# EAGLE board schematic (EAGLE 9.3.0)

Size 201.91 x 131.75 mm. Coordinates in mm from the lower left corner, seen from the top.
Outline: 0,0 201.91,0 201.91,131.75 0,131.75 0,0
Copper layers (1*16): Top 0.035mm / dielectric 1.5mm / Bottom 0.035mm
Design rules "default": minimum track width 6mil, minimum drill 0.35mm, track to track 6mil, track to pad 6mil, pad to pad 6mil, via to via 6mil, smd to smd 6mil, copper to edge 40mil, drill to drill 6mil, minimum pad ring 10mil, minimum via ring 8mil, stop-mask expansion 4mil, vias tented up to drill 0mil, thermal gap 10mil

## Footprints (pad centres in the part's own frame; a part is rotated, then mirrored left to right if it is on the bottom)
1X02 = drill 1.016 pad 1.88: 1 0,0; 2 2.54,0
TACTILE_SWITCH_PTH_6.0MM = drill 1.016 pad 1.88: 1 -3.251,2.261; 2 3.251,2.261; 3 -3.251,-2.261; 4 3.251,-2.261
C0805 = smd 1.3 x 1.5: 1 -0.95,0; 2 0.95,0
1X03 = drill 1.016 pad 1.88: 1 0,0; 2 2.54,0; 3 5.08,0
TO254P483X1016X1994-3P = drill 1.38 pad 2.07 square: 1 0,0 | drill 1.38 pad 2.07: 2 2.54,0; 3 5.08,0
DIL06 = drill 0.813 offset: 1 -2.54,-3.81; 2 0,-3.81; 3 2.54,-3.81; 4 2.54,3.81; 5 0,3.81; 6 -2.54,3.81
TO220 = drill 1.118 long: 1 -2.54,-10.16; 2 0,-10.16; 3 2.54,-10.16
PT-10S = drill 1.016 pad 1.778 octagon: 1 -2.54,-1.27; 2 2.54,-1.27; 3 0,1.27
0411/12 = drill 0.914 octagon: 1 -6.35,0; 2 6.35,0

## Placement (x,y rotation side)
ARDUINO1  [1X02]  24.13,5.08 180 top
ARDUINO2  [1X02]  162.56,3.81 0 top
BOTON  MOMENTARY-SWITCH-SPST-PTH-6.0MM  [TACTILE_SWITCH_PTH_6.0MM]  115.57,111.76 0 bottom
C1  [C0805]  86.36,63.5 180 top
J1  455-1750-1-ND  [1X03]  33.02,110.49 90 top
J2  455-1750-1-ND  [1X03]  170.18,109.22 90 top
MOTOR  [1X02]  95.25,39.37 180 top
N-CHANEL  IRLB8721PBF  [TO254P483X1016X1994-3P]  55.88,16.51 0 top
N-CHANEL2  IRLB8721PBF  [TO254P483X1016X1994-3P]  130.81,16.51 0 bottom
OK1  4N35  [DIL06]  35.56,36.83 270 top
OK2  4N35  [DIL06]  148.59,36.83 270 bottom
P-CHANEL  FQP27P06  [TO220]  55.88,60.96 0 top
P-CHANEL2  FQP27P06  [TO220]  130.81,60.96 0 bottom
POTENCIOMETRO  [PT-10S]  45.72,113.03 270 top
R1  330 ohm  [0411/12]  21.59,33.02 90 top
R2  330 ohm  [0411/12]  165.1,33.02 270 top
R3  1 k  [0411/12]  39.37,76.2 90 top
R4  1 k  [0411/12]  144.78,76.2 90 top
R5  [0411/12]  148.59,111.76 180 top

## Library data of the parts
ARDUINO1 ARDUINO2 MOTOR = SparkFun-Connectors
BOTON = SparkFun-Switches; PROD_ID: SWCH-08441; SF_SKU: COM-00097
C1 = rcl; SPICEPREFIX: C
J1 J2 = SparkFun-Connectors; PROD_ID: XXX-00000
N-CHANEL N-CHANEL2 = IRLB8721PBF; DESCRIPTION: Infineon IRLB8721PBF N-Channel MOSFET, 62 A, 30 V HEXFET, 3-Pin TO-220AB; HEIGHT: 4.83mm; MANUFACTURER_NAME: Infineon; MANUFACTURER_PART_NUMBER: IRLB8721PBF; MOUSER_PART_NUMBER: 942-IRLB8721PBF; MOUSER_PRICE-STOCK: https://www.mouser.com/Search/Refine.aspx?Keyword=942-IRLB8721PBF; RS_PART_NUMBER: 7259322P; RS_PRICE-STOCK: http://uk.rs-online.com/web/p/products/7259322P
OK1 OK2 = optocoupler; MF: FAIRCHILD SEMICONDUCTOR; MPN: 4N35; OC_FARNELL: 1328375; OC_NEWARK: 72K9946
P-CHANEL P-CHANEL2 = FQP27P06
POTENCIOMETRO = rcl; SPICEMODEL: POT; SPICEPREFIX: X
R1-R5 = rcl

## Nets
5V: C1.1 P-CHANEL2.3 P-CHANEL.3 R3.2 R4.2
GND: C1.2 N-CHANEL2.3 N-CHANEL.3 OK1.4 OK2.4
N$1: MOTOR.2 N-CHANEL.2 P-CHANEL.2
N$2: MOTOR.1 N-CHANEL2.2 P-CHANEL2.2
N$3: N-CHANEL2.1 OK2.5 P-CHANEL2.1 R4.1
N$4: OK1.1 R1.2
N$5: N-CHANEL.1 OK1.5 P-CHANEL.1 R3.1
N$6: ARDUINO1.2 R1.1
N$7: ARDUINO1.1 OK1.2
N$8: OK2.1 R2.1
N$9: ARDUINO2.2 R2.2
N$10: ARDUINO2.1 OK2.2
N$11: J2.2 R5.1
N$12: J1.3 POTENCIOMETRO.1
N$13: J1.2 POTENCIOMETRO.3
N$14: J1.1 POTENCIOMETRO.2
N$15: BOTON.1 J2.3 R5.2
N$16: BOTON.3 J2.1

## Tracks (layer width: path | path; a pad name or v marks a point on that pad's centre or on a via)
5V  (4 unrouted)
GND  (4 unrouted)
N$1  (2 unrouted)
N$2  (2 unrouted)
N$3  (3 unrouted)
N$4  (1 unrouted)
N$5  (3 unrouted)
N$6  (1 unrouted)
N$7  (1 unrouted)
N$8  (1 unrouted)
N$9  (1 unrouted)
N$10  (1 unrouted)
N$11  (1 unrouted)
N$12  (1 unrouted)
N$13  (1 unrouted)
N$14  (1 unrouted)
N$15  (2 unrouted)
N$16  (1 unrouted)